# Altium PCB main_board.PcbDoc
Units mm, origin at the board's own origin, x right, y up, seen from the top; angles counter-clockwise.
Board outline 102 x 120 mm, 2 copper layers (Top Layer, Top, Bottom Layer, Bottom), stack 1.58 mm thick; 96 components, 124 nets, 564 pads, 0 vias.
Unrouted connection lines stored in the file: 205.
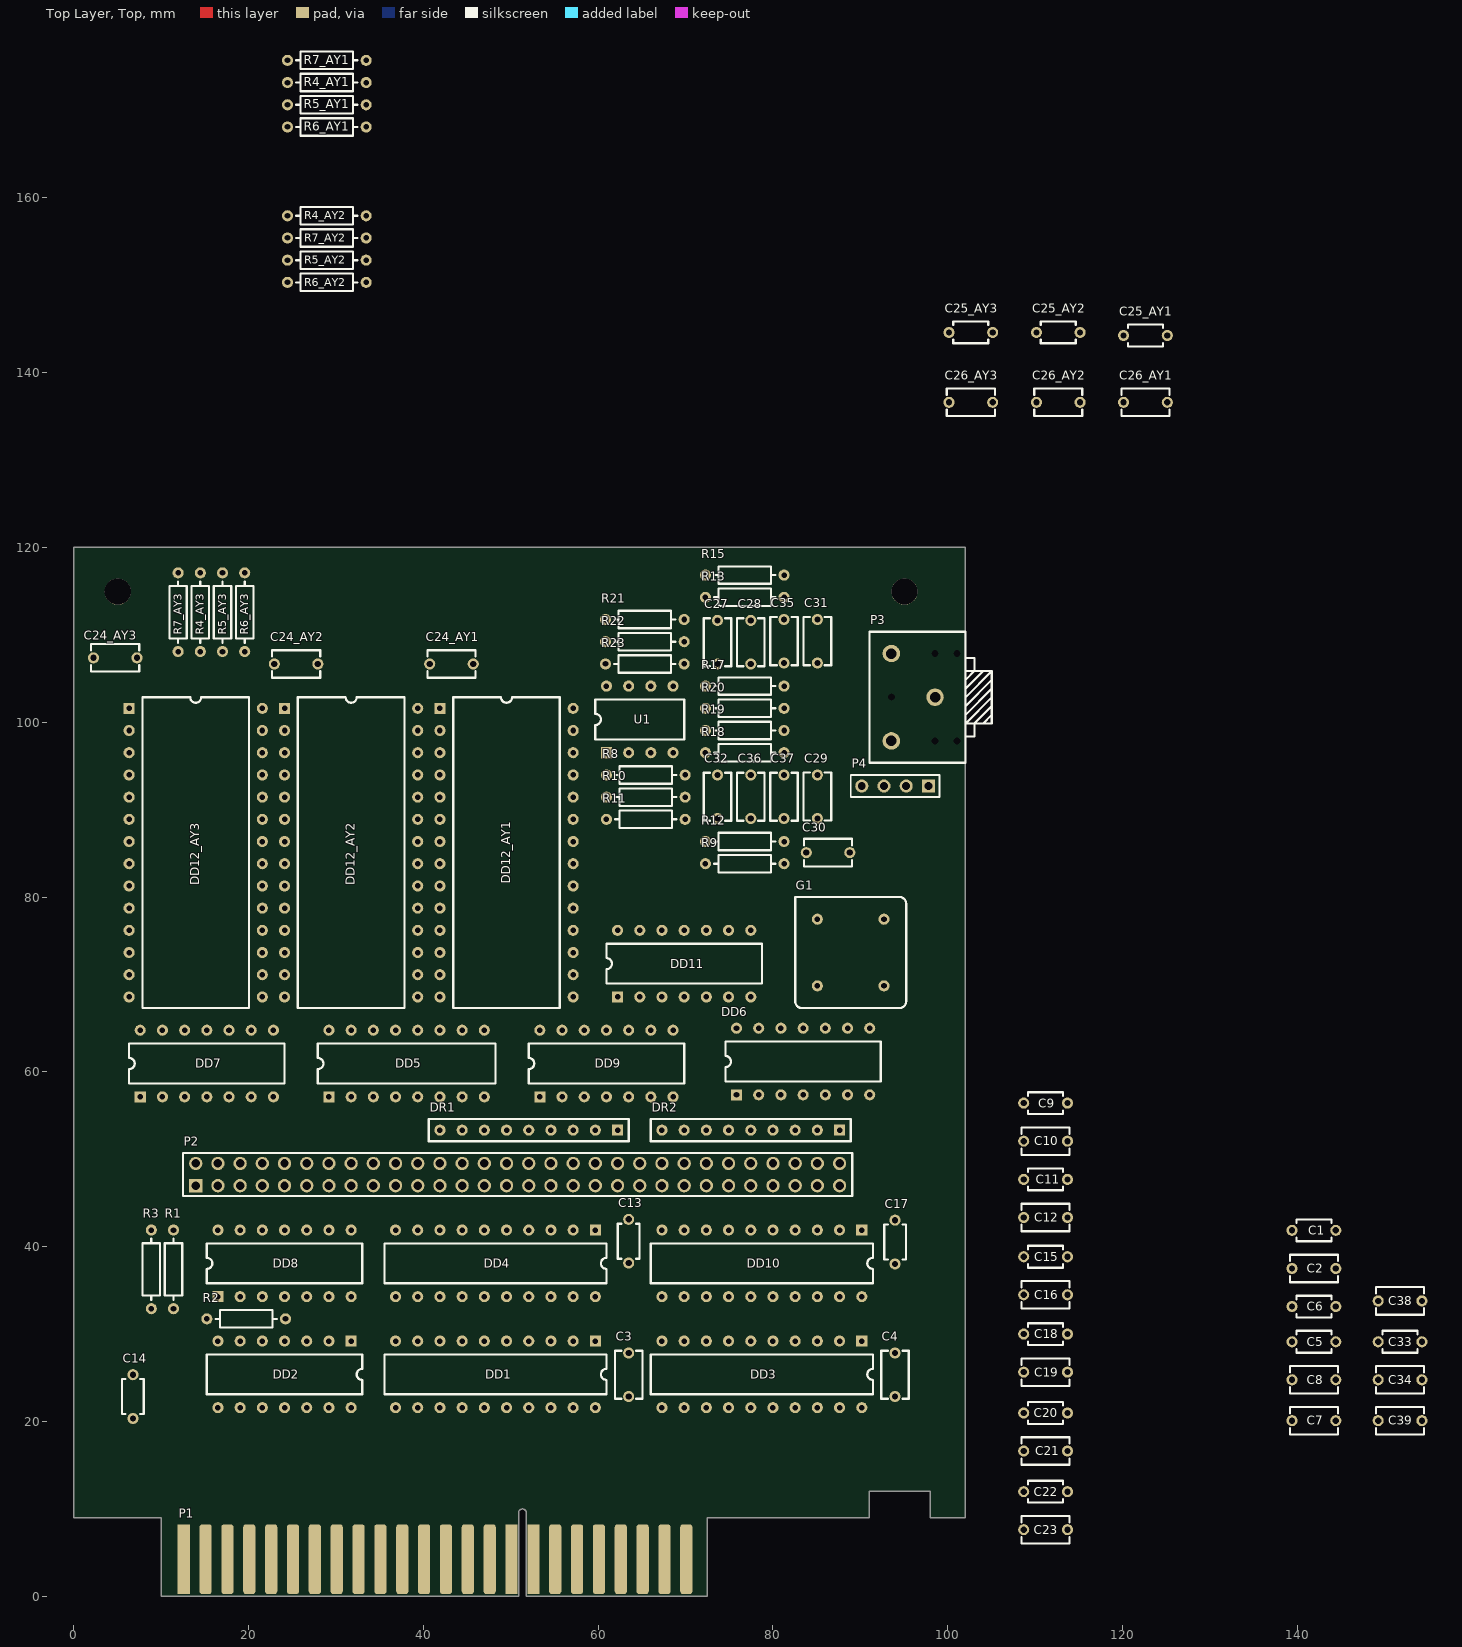
[diagram p0: Top Layer, Top view]
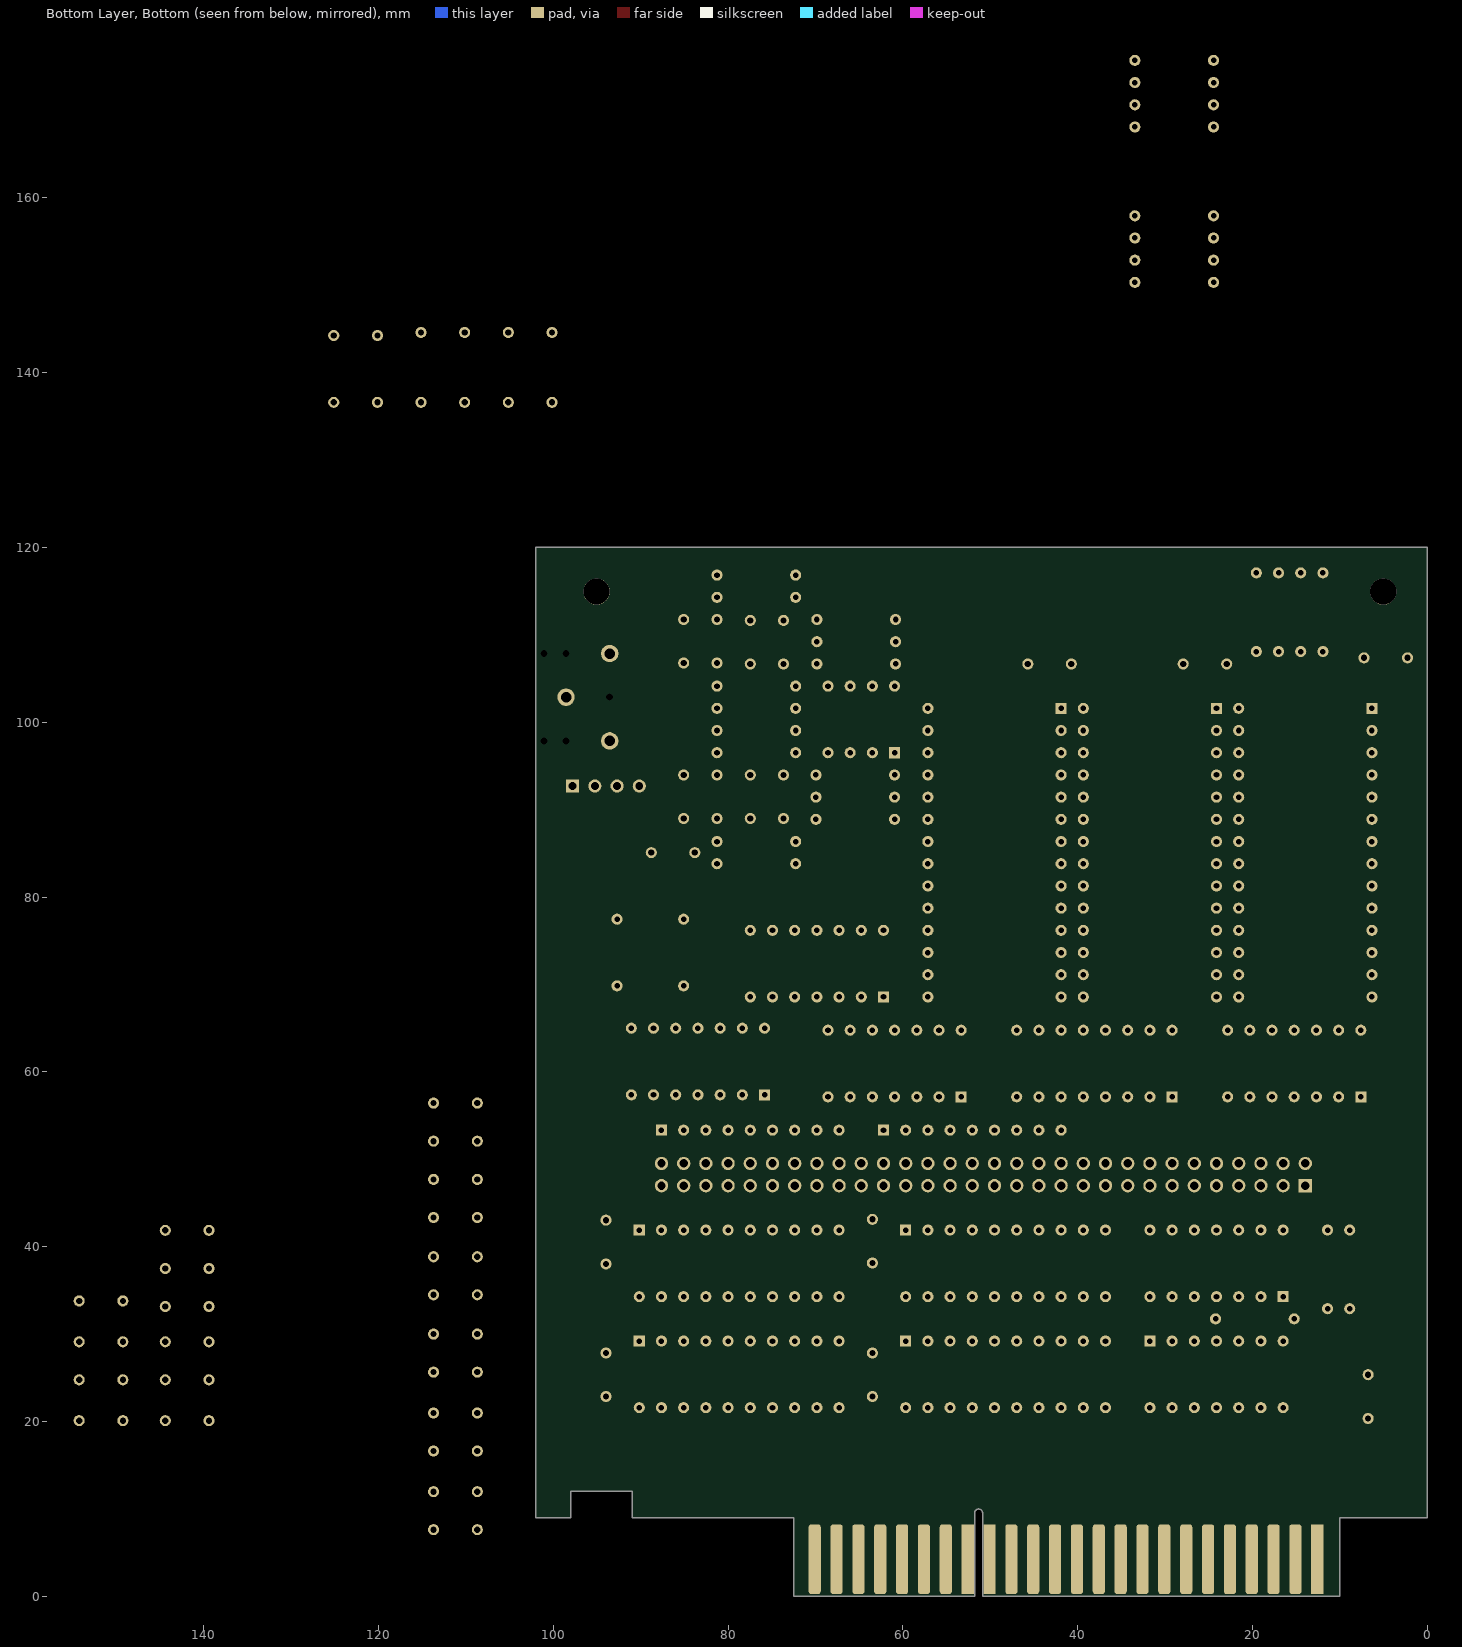
[diagram p1: Bottom Layer, Bottom view, seen from below]

## Layer stack, top to bottom
Top Solder, Top Mask: solder mask 0.0102, Solder Resist, Dk 3.5
Top Layer, Top: signal copper 0.0356
Dielectric 1: dielectric 1.509, FR-4, Dk 4.8
Bottom Layer, Bottom: signal copper 0.0356
Bottom Solder, Bot Mask: solder mask 0.0102, Solder Resist, Dk 3.5

## Board outline
10.05,0 50.9,0 50.9,9.552 cw(c51.35,9.55) 51.8,9.55 51.8,0 72.5,0 72.5,9 91,9 91,12 98,12 98,9 102,9 102,120 0,120 0,9 10.05,9

## Design rules (kind name [scope] priority, off if disabled: settings)
BoardOutlineClearance [OnCopper] p1: gap=0.25 ignorepadtopadclearanceinfootprint=FALSE
Clearance BigHoleClearance [IsPad && HoleDiameter > 5] p1: gap=0.15 ignorepadtopadclearanceinfootprint=FALSE except(0.45: Arc-Hole Track-Hole SMDPad-Hole THPad-Hole Via-Hole Fill-Hole Poly-Hole Region-Hole Text-Hole)
Clearance KeepOutClearance [Keepout] p2: gap=0.2 ignorepadtopadclearanceinfootprint=FALSE
Clearance PolygonClearanceAllLayers [All vs InPolygon] p3: gap=0.2 ignorepadtopadclearanceinfootprint=FALSE
Clearance ClearanceInternalLayers [All vs OnMid] p4: gap=0.1 ignorepadtopadclearanceinfootprint=FALSE
Clearance ClearanceTopBottomLayers [All] p5: gap=0.15 ignorepadtopadclearanceinfootprint=FALSE
ComponentClearance [All] p1: gap=0.15 collisioncheckmode=3 verticalgap=0.15 showdistances=FALSE
DiffPairsRouting [All] p1: maxlimit=0.15 minlimit=0.1 mostfreqgap=0.15 toplayer_minwidth=0.1 toplayer_maxwidth=0.5 toplayer_prefwidth=0.3 bottomlayer_minwidth=0.1 bottomlayer_maxwidth=0.5 bottomlayer_prefwidth=0.3 maxuncoupledlength=12.7
HoleSize [All] p1: absolutevalues=TRUE maxlimit=10 minlimit=0.2 maxpercent=80.000 minpercent=20.000
HoleToHoleClearance [All] p1: gap=0.2 allowstackedmicrovias=TRUE
MatchedLengths [InDifferentialPairClass('All Differential Pairs')] p1: tolerance=0.3 checknetsindiffpair=TRUE checkdiffpairvsdiffpair=FALSE checkxsignals=FALSE checkothers=FALSE
MinimumAnnularRing [All] p1: minimumring=0.1
MinimumSolderMaskSliver [All] p1: minsoldermaskwidth=0.1
PolygonConnect [All] p1: thpad.connectstyle=Relief thpad.reliefconductorwidth=0.3 thpad.reliefentries=4 thpad.polygonreliefangle="90 Angle" thpad.airgapwidth=0.25 smdpad.connectstyle=Relief smdpad.reliefconductorwidth=0.25 smdpad.reliefentries=4 smdpad.polygonreliefangle="90 Angle" smdpad.airgapwidth=0.25 via.connectstyle=Direct via.reliefconductorwidth=0.254 via.reliefentries=4 via.polygonreliefangle="90 Angle" via.airgapwidth=0.254
RoutingVias [All] p1: holewidth=0.2 width=0.5 viastyle="Through Hole" minholewidth=0.2 minwidth=0.4 maxholewidth=1 maxwidth=2
SilkToSilkClearance [All] p1: silktosilkclearance=0.01
SilkToSolderMaskClearance [IsPad] p1: minsilkscreentomaskgap=0.01 clearancetoexposedcopper=TRUE
SolderMaskExpansion [All] p1: expansion=0.05
ViasUnderSMD [All] p1: allowed=TRUE
Width WidthInternalLayers [OnMid] p1: maxlimit=8 minlimit=0.1 preferedwidth=0.25
Width WidthTopBottomLayers [OnTopLayer Or OnBottomLayer] p2: maxlimit=8 minlimit=0.15 preferedwidth=0.25
23 further rules are at their usual default settings.

## Classes and differential pairs
net class CS_AY[1..3]: CS_AY1 CS_AY2 CS_AY3
channel class ay: AY1 AY2 AY3
net class R_IN[1..3]: R_IN3
net class L_IN[1..3]: L_IN3
net class C\S\[1..5]: C\S\1 C\S\2 C\S\3 C\S\4 C\S\5
net class C\E\[0..3]: C\E\0 C\E\1 C\E\2 C\E\3
net class AD[0..15]: AD0 AD1 AD2 AD3 AD4 AD5 AD6 AD7 AD8 AD9 AD10 AD11 AD12 AD13 AD14 AD15
net class A[0..12]: A0 A1 A2 A3 A4 A5 A6 A7 A8 A9 A10 A11 A12
component class "Future Connector": P2
component class AY3: C7_AY3 C24_AY3 C25_AY3 C26_AY3 DD12_AY3 R4_AY3 R5_AY3 R6_AY3 R7_AY3 R8_AY3 R9_AY3
component class AY2: C7_AY2 C24_AY2 C25_AY2 C26_AY2 DD12_AY2 R4_AY2 R5_AY2 R6_AY2 R7_AY2 R8_AY2 R9_AY2
component class AY1: C7_AY1 C24_AY1 C25_AY1 C26_AY1 DD12_AY1 R4_AY1 R5_AY1 R6_AY1 R7_AY1 R8_AY1 R9_AY1
component class "Address Detector": C9 C10 C11 C12 C13 C14 C15 C16 C17 C18 C19 C20 C21 C22 C23 DD4 DD5 DD6 DD7 DD8 DD9 DD10 DD11 G1 R1 R2 R3
component class "System Bus": C1 C2 C3 C4 C5 C6 C7 C8 DD1 DD2 DD3 DD? DR1 DR2 P1
component class "Audio Mixer": C27 C28 C29 C30 C31 C32 C33 C34 C35 C36 C37 C38 C39 DD12 P3 P4 R8 R9 R10 R11 R12 R13 R15 R17 R18 R19 R20 R21 R22 R23 R24 R25 U1

## Components (designator, comment, footprint, x,y, rotation, side; value= is the part's Value field where it differs from the comment)
C1 "0.1u" "CAP 4x2.5" 141.899,41.881 r180 top
C2 "4.7u" "CAP 5.5x3.15"#1 141.899,37.506 r180 top
C3 "10u" "CAP 5.5x3.15"#2 63.5,22.86 r90 top
C4 "10u" "CAP 5.5x3.15"#2 93.98,22.86 r90 top
C5 "0.1u" "CAP 4x2.5" 141.899,29.131 r180 top
C6 "0.1u" "CAP 4x2.5" 141.899,33.156 r180 top
C7 "4.7u" "CAP 5.5x3.15"#1 141.899,20.105 r180 top
C8 "4.7u" "CAP 5.5x3.15"#1 141.899,24.78 r180 top
C9 "0.1u" "CAP 4x2.5" 111.2,56.433 r180 top
C10 "4.7u" "CAP 5.5x3.15"#1 111.2,52.082 r180 top
C11 "0.1u" "CAP 4x2.5" 111.2,47.707 r180 top
C12 "4.7u" "CAP 5.5x3.15"#1 111.2,43.357 r180 top
C13 "Cap" "CAP 4x2.5" 63.5,40.64 r270 top
C14 "200" "CAP 4x2.5" 6.786,22.86 r270 top
C15 "0.1u" "CAP 4x2.5" 111.2,38.857 r180 top
C16 "4.7u" "CAP 5.5x3.15"#1 111.2,34.506 r180 top
C17 "Cap" "CAP 4x2.5" 93.98,40.538 r270 top
C18 "0.1u" "CAP 4x2.5" 111.2,30.006 r180 top
C19 "4.7u" "CAP 5.5x3.15"#1 111.2,25.656 r180 top
C20 "0.1u" "CAP 4x2.5" 111.2,20.981 r180 top
C21 "4.7u" "CAP 5.5x3.15"#1 111.2,16.631 r180 top
C22 "0.1u" "CAP 4x2.5" 111.2,11.98 r180 top
C23 "4.7u" "CAP 5.5x3.15"#1 111.2,7.63 r180 top
C24_AY1 "10u" "CAP 5.5x3.15"#2 40.742,106.68 r0 top (schematic designator C24)
C24_AY2 "10u" "CAP 5.5x3.15"#2 22.962,106.68 r0 top (schematic designator C24)
C24_AY3 "10u" "CAP 5.5x3.15"#2 7.25,107.375 r180 top (schematic designator C24)
C25_AY1 "0.1u" "CAP 4x2.5" 122.623,144.255 r180 top (schematic designator C25)
C25_AY2 "0.1u" "CAP 4x2.5" 112.648,144.606 r180 top (schematic designator C25)
C25_AY3 "0.1u" "CAP 4x2.5" 102.647,144.606 r180 top (schematic designator C25)
C26_AY1 "4.7u" "CAP 5.5x3.15"#1 122.623,136.605 r180 top (schematic designator C26)
C26_AY2 "4.7u" "CAP 5.5x3.15"#1 112.648,136.605 r180 top (schematic designator C26)
C26_AY3 "4.7u" "CAP 5.5x3.15"#1 102.647,136.605 r180 top (schematic designator C26)
C27 "10u" "CAP 5.5x3.15"#2 73.66,111.658 r270 top
C28 "10u" "CAP 5.5x3.15"#2 77.47,111.658 r270 top
C29 "10u" "CAP 5.5x3.15"#2 85.09,89.002 r90 top
C30 "10u" "CAP 5.5x3.15"#2 88.798,85.09 r180 top
C31 "10u" "CAP 5.5x3.15"#2 85.09,106.782 r90 top
C32 "10u" "CAP 5.5x3.15"#2 73.66,93.98 r270 top
C33 "0.1u" "CAP 4x2.5" 151.749,29.131 r180 top
C34 "4.7u" "CAP 5.5x3.15"#1 151.749,24.78 r180 top
C35 "10u" "CAP 5.5x3.15"#2 81.28,106.782 r90 top
C36 "10u" "CAP 5.5x3.15"#2 77.47,93.98 r270 top
C37 "10u" "CAP 5.5x3.15"#2 81.28,93.98 r270 top
C38 "1200 NC" "CAP 5.5x3.15"#1 151.749,33.806 r180 top
C39 "1200 NC" "CAP 5.5x3.15"#1 151.749,20.105 r180 top
DD1 "74F642N" DIP20 59.69,29.21 r270 top
DD2 "74x1034" DIP14 31.75,29.21 r270 top
DD3 "74F642N" DIP20 90.17,29.21 r270 top
DD4 "74x573" DIP20 59.69,41.91 r270 top
DD5 "74x138" DIP16 29.21,57.15 r90 top
DD6 "74x27" DIP14 75.84,57.38 r90 top
DD7 "74x08" DIP14 7.62,57.15 r90 top
DD8 "74x38" DIP14 16.51,34.29 r90 top
DD9 "74x30" DIP14 53.34,57.15 r90 top
DD10 "74x573" DIP20 90.17,41.91 r270 top
DD11 "74x393" DIP14 62.23,68.58 r90 top
DD12_AY1 "AY-3-8912" DIP28 41.91,101.6 r0 top (schematic designator DD12)
DD12_AY2 "AY-3-8912" DIP28 24.13,101.6 r0 top (schematic designator DD12)
DD12_AY3 "AY-3-8912" DIP28 6.35,101.6 r0 top (schematic designator DD12)
DR1 "RNA8" SIP9 62.23,53.34 r270 top
DR2 "RNA8" SIP9 87.63,53.34 r270 top
G1 "CXO" "DIP8 CXO" 82.55,80.01 r0 top
P1 "EDGE" "SNP15-48 EDGE" 12.6,4.25 r0 top locked
P2 "PLD60" PLD60 50.8,48.26 r180 top
P3 "3.5mm audio socket" ST-111 98.552,102.87 r180 top
P4 "Header 4" HDR1X4 97.79,92.71 r180 top
R1 "2.2K" "Axial Res 0.25" 11.43,41.91 r270 top
R2 "2.2K" "Axial Res 0.25" 24.24,31.75 r180 top
R3 "2.2K" "Axial Res 0.25" 8.89,32.91 r90 top
R4_AY1 "1K" "Axial Res 0.25" 33.47,173.19 r180 top (schematic designator R4)
R4_AY2 "1K" "Axial Res 0.25" 33.47,157.95 r180 top (schematic designator R4)
R4_AY3 "1K" "Axial Res 0.25" 14.495,117.095 r270 top (schematic designator R4)
R5_AY1 "2.2K" "Axial Res 0.25" 33.47,170.65 r180 top (schematic designator R5)
R5_AY2 "2.2K" "Axial Res 0.25" 33.47,152.87 r180 top (schematic designator R5)
R5_AY3 "2.2K" "Axial Res 0.25" 17.035,117.095 r270 top (schematic designator R5)
R6_AY1 "2.2K" "Axial Res 0.25" 33.47,168.11 r180 top (schematic designator R6)
R6_AY2 "2.2K" "Axial Res 0.25" 33.47,150.33 r180 top (schematic designator R6)
R6_AY3 "2.2K" "Axial Res 0.25" 19.575,117.095 r270 top (schematic designator R6)
R7_AY1 "1K" "Axial Res 0.25" 33.47,175.73 r180 top (schematic designator R7)
R7_AY2 "1K" "Axial Res 0.25" 33.47,155.41 r180 top (schematic designator R7)
R7_AY3 "1K" "Axial Res 0.25" 11.955,117.095 r270 top (schematic designator R7)
R8 "24k" "Axial Res 0.25" 69.96,93.98 r180 top
R9 "100K" "Axial Res 0.25" 81.28,83.82 r180 top
R10 "10k" "Axial Res 0.25" 69.96,91.44 r180 top
R11 "510" "Axial Res 0.25" 69.96,88.9 r180 top
R12 "24k" "Axial Res 0.25" 81.28,86.36 r180 top
R13 "1K" "Axial Res 0.25" 81.28,114.3 r180 top
R15 "510" "Axial Res 0.25" 81.28,116.84 r180 top
R17 "1K" "Axial Res 0.25" 81.28,104.14 r180 top
R18 "24k" "Axial Res 0.25" 81.28,96.52 r180 top
R19 "510" "Axial Res 0.25" 81.28,99.06 r180 top
R20 "100K" "Axial Res 0.25" 81.28,101.6 r180 top
R21 "24k" "Axial Res 0.25" 69.85,111.76 r180 top
R22 "10k" "Axial Res 0.25" 69.85,109.22 r180 top
R23 "510" "Axial Res 0.25" 69.85,106.68 r180 top
U1 "LM358N" DIP8 60.96,96.52 r90 top

## Footprints (in the part's own frame and the unit in brackets; to place one, negate y for a bottom-side part, rotate by r counter-clockwise, add the part's x,y. Pads: shape width x height; smd on the part's side, far side on the other; paste and mask are expansions set on the pad)
"Axial Res 0.25" [mm]
  round 1.27 hole 0.635: ""(0,0) ""(9,0)
  silkscreen extent 1,-1 8,1, body extent -0.19,-1.19 9.21,1.19, height 2.57
"CAP 4x2.5" [mm]
  round 1.27 hole 0.711: 1(-2.5,0) 2(2.5,0)
  silkscreen extent -2,-1.25 2,1.25
"CAP 5.5x3.15"#1 [mm]
  round 1.27 hole 0.711: 1(-2.5,0) 2(2.5,0)
  silkscreen extent -2.75,-1.58 2.75,1.58
"CAP 5.5x3.15"#2 [mm]
  round 1.27 hole 0.711: 1(0,0) 2(4.978,0)
  silkscreen extent -0.25,-1.58 5.25,1.58
DIP8 [mm]
  rect 1.27x1.27 hole 0.635: 1(0,0)
  round 1.27 hole 0.635: 2(0,-2.54) 3(0,-5.08) 4(0,-7.62) 5(7.62,-7.62) 6(7.62,-5.08) 7(7.62,-2.54) 8(7.62,0)
  silkscreen extent 1.52,-8.89 6.1,1.27, body extent -0.12,-8.41 7.75,0.79, height 3.85
"DIP8 CXO" [mm]
  round 1.27 hole 0.635: 1(2.54,-2.54) 4(10.16,-2.54) 5(10.16,-10.16) 8(2.54,-10.16)
  silkscreen extent 0,-12.7 12.7,0, body extent 0,-12.7 12.7,0, height 4.6
DIP14 [mm]
  rect 1.27x1.27 hole 0.635: 1(0,0)
  round 1.27 hole 0.635: 2(0,-2.54) 3(0,-5.08) 4(0,-7.62) 5(0,-10.16) 6(0,-12.7) 7(0,-15.24) 8(7.62,-15.24) 9(7.62,-12.7) 10(7.62,-10.16) 11(7.62,-7.62) 12(7.62,-5.08) 13(7.62,-2.54) 14(7.62,0)
  silkscreen extent 1.52,-16.51 6.1,1.27, body extent 0,-17.22 7.62,1.98, height 4
DIP16 [mm]
  rect 1.27x1.27 hole 0.635: 1(0,0)
  round 1.27 hole 0.635: 2(0,-2.54) 3(0,-5.08) 4(0,-7.62) 5(0,-10.16) 6(0,-12.7) 7(0,-15.24) 8(0,-17.78) 9(7.62,-17.78) 10(7.62,-15.24) 11(7.62,-12.7) 12(7.62,-10.16) 13(7.62,-7.62) 14(7.62,-5.08) 15(7.62,-2.54) 16(7.62,0)
  silkscreen extent 1.52,-19.05 6.1,1.27, body extent -0.13,-18.92 7.75,1.14, height 5.33
DIP20 [mm]
  rect 1.27x1.27 hole 0.635: 1(0,0)
  round 1.27 hole 0.635: 2(0,-2.54) 3(0,-5.08) 4(0,-7.62) 5(0,-10.16) 6(0,-12.7) 7(0,-15.24) 8(0,-17.78) 9(0,-20.32) 10(0,-22.86) 11(7.62,-22.86) 12(7.62,-20.32) 13(7.62,-17.78) 14(7.62,-15.24) 15(7.62,-12.7) 16(7.62,-10.16) 17(7.62,-7.62) 18(7.62,-5.08) 19(7.62,-2.54) 20(7.62,0)
  silkscreen extent 1.52,-24.13 6.1,1.27, body extent -0.13,-24.51 7.75,1.65, height 5.33
DIP28 [mm]
  rect 1.27x1.27 hole 0.635: 1(0,0)
  round 1.27 hole 0.635: 2(0,-2.54) 3(0,-5.08) 4(0,-7.62) 5(0,-10.16) 6(0,-12.7) 7(0,-15.24) 8(0,-17.78) 9(0,-20.32) 10(0,-22.86) 11(0,-25.4) 12(0,-27.94) 13(0,-30.48) 14(0,-33.02) 15(15.24,-33.02) 16(15.24,-30.48) 17(15.24,-27.94) 18(15.24,-25.4) 19(15.24,-22.86) 20(15.24,-20.32) 21(15.24,-17.78) 22(15.24,-15.24) 23(15.24,-12.7) 24(15.24,-10.16) 25(15.24,-7.62) 26(15.24,-5.08) 27(15.24,-2.54) 28(15.24,0)
  silkscreen extent 1.52,-34.29 13.72,1.27, body extent -0.1,-34.81 15.49,1.79, height 4.3
HDR1X4 [mm] "Connector; Header; 4 Position"
  rect 1.5x1.5 hole 0.9: 1(0,0)
  round 1.5 hole 0.9: 2(2.54,0) 3(5.08,0) 4(7.62,0)
  silkscreen extent -1.27,-1.27 8.89,1.27
PLD60 [mil]
  rect 60x60 hole 38: 1(1450,50)
  round 60 hole 38: 2(1450,-50) 3(1350,50) 4(1350,-50) 5(1250,50) 6(1250,-50) 7(1150,50) 8(1150,-50) 9(1050,50) 10(1050,-50) 11(950,50) 12(950,-50) 13(850,50) 14(850,-50) 15(750,50) 16(750,-50) 17(650,50) 18(650,-50) 19(550,50) 20(550,-50) 21(450,50) 22(450,-50) 23(350,50) 24(350,-50) 25(250,50) 26(250,-50) 27(150,50) 28(150,-50) 29(50,50) 30(50,-50) 31(-50,50) 32(-50,-50) 33(-150,50) 34(-150,-50) 35(-250,50) 36(-250,-50) 37(-350,50) 38(-350,-50) 39(-450,50) 40(-450,-50) 41(-550,50) 42(-550,-50) 43(-650,50) 44(-650,-50) 45(-750,50) 46(-750,-50) 47(-850,50) 48(-850,-50) 49(-950,50) 50(-950,-50) 51(-1050,50) 52(-1050,-50) 53(-1150,50) 54(-1150,-50) 55(-1250,50) 56(-1250,-50) 57(-1350,50) 58(-1350,-50) 59(-1450,50) 60(-1450,-50)
  silkscreen extent -1507,-97 1507,97, body extent -1500,-100 1500,100, height 339
SIP9 [mm]
  rect 1.27x1.27 hole 0.635: 1(0,0)
  round 1.27 hole 0.635: 2(0,-2.54) 3(0,-5.08) 4(0,-7.62) 5(0,-10.16) 6(0,-12.7) 7(0,-15.24) 8(0,-17.78) 9(0,-20.32)
  silkscreen extent -1.27,-21.59 1.27,1.27, body extent -1.25,-21.61 1.25,1.29, height 6.08
"SNP15-48 EDGE" [mm]
  rect 1.4x8 smd far side: A1(0,0) A16(37.5,0) A17(40,0)
  rrect50% 1.4x8 smd far side: A2(2.5,0) A3(5,0) A4(7.5,0) A5(10,0) A6(12.5,0) A7(15,0) A8(17.5,0) A9(20,0) A10(22.5,0) A11(25,0) A12(27.5,0) A13(30,0) A14(32.5,0) A15(35,0) A18(42.5,0) A19(45,0) A20(47.5,0) A21(50,0) A22(52.5,0) A23(55,0) A24(57.5,0)
  rect 1.4x8 smd: B1(0,0) B16(37.5,0) B17(40,0)
  rrect50% 1.4x8 smd: B2(2.5,0) B3(5,0) B4(7.5,0) B5(10,0) B6(12.5,0) B7(15,0) B8(17.5,0) B9(20,0) B10(22.5,0) B11(25,0) B12(27.5,0) B13(30,0) B14(32.5,0) B15(35,0) B18(42.5,0) B19(45,0) B20(47.5,0) B21(50,0) B22(52.5,0) B23(55,0) B24(57.5,0)
ST-111 [mm]
  round 0 hole 0.762 unplated: 0(0,-5)
  round 2 hole 1.2: 1(0,0) 2(5,5) 3(5,-5)
  round 0 hole 0.8 unplated: ""(-2.5,5) ""(-2.5,-5) ""(0,5) ""(5,0)
  silkscreen extent -6.5,-7.5 7.5,7.5

## Part data
C1 C2 C3 C4 C5 C6 C7 C8 C9 C10 C11 C12 C14 C15 C16 C18 C19 C20 C21 C22 C23 C24_AY1 C24_AY2 C24_AY3 C25_AY1 C25_AY2 C25_AY3 C26_AY1 C26_AY2 C26_AY3 C27 C28 C29 C30 C31 C32 C33 C34 C35 C36 C37 C38 C39: library part Cap, "Murata ceramic capacitor"
C13 C17: "Murata ceramic capacitor"
DD1 DD3: library part 74x642
DD2: library part "74x1034 IEEE", "ЛП19 6 buffers"
DD4 DD10: "ИР22 transparent latch"
DD5: "ИД7 3 to 8 DEMUX"
DD6: "ЛЕ4 3x3NOR"
DD7: "ЛИ1 4x2AND"
DD8: "ЛА13 4x2NAND O.C."
DD9: "ЛА2 8NAND"
DD11: "ИЕ19"
G1: Frequency=xx.xxxxxMHz
P1: library part "SNP15-48 EDGE"
P4: "Header, 4-Pin", LatestRevisionDate=17-Jul-2002, LatestRevisionNote="Re-released for DXP Platform.", Publisher="Altium Limited"
R1 R2 R3 R4_AY1 R4_AY2 R4_AY3 R5_AY1 R5_AY2 R5_AY3 R6_AY1 R6_AY2 R6_AY3 R7_AY1 R7_AY2 R7_AY3 R8 R9 R10 R11 R12 R13 R15 R17 R18 R19 R20 R21 R22 R23: library part "Axial Resistor 0.25"

## Free pads (board coordinates)
  round 3 hole 3 unplated: 0(5.05,114.95) 0(95.05,114.95)

## Nets (pads, with @x,y where several pads share a name; then routed paths per layer and width w, separated by ;. In a path a pad name is that pad's centre, name@x,y a point inside that pad or via, vN(x,y) a via of type N, cw(c..) or ccw(c..) an arc to the next point about the centre after c; other vN are vias at no path point)
3.58MHz: DD11.4 P2.7
4MHz: DD2.8 P2.8
+5: C1.2 C2.2 C3.2 C4.2 C5.2 C6.2 C7.2 C8.2 C9.2 C10.2 C11.2 C12.2 C13.2 C15.2 C16.2 C17.2 C18.2 C19.2 C20.2 C21.2 C22.2 C23.2 C24_AY1.2 C24_AY2.2 C24_AY3.2 C25_AY1.2 C25_AY2.2 C25_AY3.2 C26_AY1.2 C26_AY2.2 C26_AY3.2 C30.2 C33.2 C34.2 DD12_AY1.3 DD12_AY1.19 DD12_AY2.3 DD12_AY2.19 DD12_AY3.3 DD12_AY3.19 DR1.1 DR2.1 P1.A1 P1.A24 P2.1 P2.2 R1. R13.
A0: DD4.19 P2.39
A1: DD4.18 DD5.1 P2.37
A2: DD4.17 DD5.2 P2.35
A3: DD4.16 DD5.3 P2.33
A4: DD4.15 DD9.1 P2.31
A5: DD4.14 DD6.2 P2.29
A6: DD4.13 DD9.2 P2.27
A7: DD4.12 DD9.3 P2.25
A8: DD9.4 DD10.19 P2.55
A9: DD9.5 DD10.18 P2.53
A10: DD9.6 DD10.17 P2.51
A11: DD9.11 DD10.16 P2.49
A12: DD9.12 DD10.15 P2.47
A\1\6\: DD10.12 P2.41
A\D\0\: DD1.18 P1.B21
A\D\1\: DD1.17 P1.A21
A\D\1\0\: DD3.16 P1.B19
A\D\1\1\: DD3.15 P1.A19
A\D\1\2\: DD3.14 P1.B22
A\D\1\3\: DD3.13 P1.A22
A\D\1\4\: DD3.12 P1.B23
A\D\1\5\: DD3.11 P1.A2
A\D\2\: DD1.16 P1.B20
A\D\3\: DD1.15 P1.A20
A\D\4\: DD1.14 P1.B16
A\D\5\: DD1.13 P1.A16
A\D\6\: DD1.12 P1.B17
A\D\7\: DD1.11 P1.A17
A\D\8\: DD3.18 P1.B18
A\D\9\: DD3.17 P1.A18
AD0: DD1.2 DD4.2 DD12_AY1.28 DD12_AY2.28 DD12_AY3.28 DR1.2 P2.40
AD1: DD1.3 DD4.3 DD12_AY1.27 DD12_AY2.27 DD12_AY3.27 DR1.3 P2.38
AD2: DD1.4 DD4.4 DD12_AY1.26 DD12_AY2.26 DD12_AY3.26 DR1.4 P2.36
AD3: DD1.5 DD4.5 DD12_AY1.25 DD12_AY2.25 DD12_AY3.25 DR1.5 P2.34
AD4: DD1.6 DD4.6 DD12_AY1.24 DD12_AY2.24 DD12_AY3.24 DR1.6 P2.32
AD5: DD1.7 DD4.7 DD12_AY1.23 DD12_AY2.23 DD12_AY3.23 DR1.7 P2.30
AD6: DD1.8 DD4.8 DD12_AY1.22 DD12_AY2.22 DD12_AY3.22 DR1.8 P2.28
AD7: DD1.9 DD4.9 DD12_AY1.21 DD12_AY2.21 DD12_AY3.21 DR1.9 P2.26
AD8: DD3.2 DD10.2 DR2.2 P2.56
AD9: DD3.3 DD10.3 DR2.3 P2.54
AD10: DD3.4 DD10.4 DR2.4 P2.52
AD11: DD3.5 DD10.5 DR2.5 P2.50
AD12: DD3.6 DD10.6 DR2.6 P2.48
AD13: DD3.7 DR2.7 P2.46
AD14: DD3.8 DR2.8 P2.44
AD15: DD3.9 DR2.9 P2.42
B\S\7\: DD6.13 DD10.13 P2.43
Beeper: P1.B5
C\E\0: P1.B12 P2.4
C\E\1: P1.B14 P2.3
C\E\2: P1.B13 P2.6
C\E\3: P1.A12 P2.5
C\S\1: DD5.12 P2.20
C\S\2: DD5.11 P2.17
C\S\3: DD5.10 P2.18
C\S\4: DD5.9 P2.15
C\S\5: DD5.7 P2.16
CS_AY1: DD6.6 DD12_AY1.17
CS_AY2: DD6.8 DD12_AY2.17
CS_AY3: DD8.8 DD12_AY3.17 R2.
D\I\N\: DD2.2 DD7.1 DD7.2 DD8.1 DD8.12 DD8.13 P2.21
D\O\U\T\: DD2.4 DD8.2 P2.24
e4MHz: DD2.9 P1.A4
eA\1\6\: DD10.9 P1.A3
eB\S\7\: DD10.8 P1.A6
eD\I\N\: DD2.1 P1.A14
eD\O\U\T\: DD2.3 P1.B8
eI\N\I\T\: DD2.13 P1.B10
eS\Y\N\C\: DD2.11 P1.A15
eW\T\B\T\: DD2.5 P1.A8
GND: C1.1 C2.1 C3.1 C4.1 C5.1 C6.1 C7.1 C8.1 C9.1 C10.1 C11.1 C12.1 C13.1 C14.1 C15.1 C16.1 C17.1 C18.1 C19.1 C20.1 C21.1 C22.1 C23.1 C24_AY1.1 C24_AY2.1 C24_AY3.1 C25_AY1.1 C25_AY2.1 C25_AY3.1 C26_AY1.1 C26_AY2.1 C26_AY3.1 C30.1 C32.1 C33.1 C34.1 DD1.19 DD3.19 DD4.1 DD5.5 DD10.1 DD11.2 DD11.12 DD11.13 P1.B1 P1.B24 P2.57 P2.58 P2.59 P2.60 P3.1 P4.2 P4.3 R11. R17. R23.
I\N\I\T\: DD2.12 DD12_AY1.16 DD12_AY2.16 DD12_AY3.16 P2.14
L_IN3: C28.1
NetC27_1: C27.1 C38.1 R10. U1.1
NetC27_2: C27.2 P3.3
NetC28_2: C28.2 R8.
NetC29_1: C29.1 P4.4
NetC29_2: C29.2 R12.
NetC31_1: C31.1 R15. R19.
NetC31_2: C31.2 R9. R20.
NetC32_2: C32.2 U1.3 U1.5
NetC35_1: C35.1 P4.1
NetC35_2: C35.2 R18.
NetC36_1: C36.1 C39.1 R22. U1.7
NetC36_2: C36.2 P3.2
NetC37_2: C37.2 R21.
NetC38_2: C38.2 U1.2
NetC39_2: C39.2 U1.6
NetDD5_6: DD5.6 DD6.12 DD7.12 DD8.5
NetDD5_13: DD5.13 DD8.9 DD8.10
NetDD5_14: DD5.14 DD6.9 DD6.10 DD6.11
NetDD5_15: DD5.15 DD6.3 DD6.4 DD6.5
NetDD6_1: DD6.1 DD9.8
NetDD7_3: DD7.3 DD7.4
NetDD7_5: DD7.5 DD7.9 DD8.3 DD8.4
NetDD7_6: DD7.6 DD12_AY1.18 DD12_AY2.18 DD12_AY3.18
NetDD7_8: DD7.8 DD12_AY1.20 DD12_AY2.20 DD12_AY3.20
NetDD7_13: DD7.13 DD8.11 R3.
NetDD11_1: DD11.1 G1.5
NetDD11_5: DD11.5 DD12_AY1.15 DD12_AY2.15 DD12_AY3.15
NetDD12_AY1_1: DD12_AY1.1 R7_AY1.
NetDD12_AY1_4: DD12_AY1.4 R6_AY1.
NetDD12_AY1_5: DD12_AY1.5
NetDD12_AY2_1: DD12_AY2.1 R7_AY2.
NetDD12_AY2_4: DD12_AY2.4 R6_AY2.
NetDD12_AY2_5: DD12_AY2.5
NetDD12_AY3_1: DD12_AY3.1 R7_AY3.
NetDD12_AY3_4: DD12_AY3.4 R6_AY3.
NetDD12_AY3_5: DD12_AY3.5
NetR4_AY1: R4_AY1. R5_AY1.
NetR4_AY2: R4_AY2. R5_AY2.
NetR4_AY3: R4_AY3. R5_AY3.
NetR6_AY1: 
NetR6_AY2: 
NetR6_AY3: 
R\P\L\Y\: DD8.6 P1.B15 P2.19
R_IN3: C37.1
S\Y\N\C\: C14.2 DD2.10 DD4.11 DD5.4 DD10.11 P2.22
T/R\: DD1.1 DD3.1 DD7.11
W\T\B\T\: DD2.6 DD7.10 P2.23
ПТВ: DD12_AY1.6 DD12_AY2.6 DD12_AY3.6
pads on no net: DD1.10 DD1.20 DD2.7 DD2.14 DD3.10 DD3.20 DD4.10 DD4.20 DD5.8 DD5.16 DD6.7 DD6.14 DD7.7 DD7.14 DD8.7 DD8.14 DD9.7 DD9.9 DD9.10 DD9.13 DD9.14 DD10.7 DD10.10 DD10.14 DD10.20 DD11.3 DD11.6 DD11.7 DD11.8 DD11.9 DD11.10 DD11.11 DD11.14 DD12_AY1.2 DD12_AY1.7 DD12_AY1.8 DD12_AY1.9 DD12_AY1.10 DD12_AY1.11 DD12_AY1.12 DD12_AY1.13 DD12_AY1.14 DD12_AY2.2 DD12_AY2.7 DD12_AY2.8 DD12_AY2.9 DD12_AY2.10 DD12_AY2.11 DD12_AY2.12 DD12_AY2.13 DD12_AY2.14 DD12_AY3.2 DD12_AY3.7 DD12_AY3.8 DD12_AY3.9 DD12_AY3.10 DD12_AY3.11 DD12_AY3.12 DD12_AY3.13 DD12_AY3.14 G1.1 G1.4 G1.8 P1.A5 P1.A7 P1.A9 P1.A10 P1.A11 P1.A13 P1.A23 P1.B2 P1.B3 P1.B4 P1.B6 P1.B7 P1.B9 P1.B11 P2.9 P2.10 P2.11 P2.12 P2.13 P2.45 P3. P3.0 U1.4 U1.8

## Silkscreen, mask and mechanical layers (free items; w line width, h text height)
Mechanical 15:
  the board outline again, w0.1